# Altium PCB OutputModule.PcbDoc
Units mm, origin at the board's own origin, x right, y up, seen from the top; angles counter-clockwise.
Board outline 37.08 x 57.91 mm, 2 copper layers (Top Layer, Bottom Layer); 47 components, 38 nets, 176 pads, 55 vias.
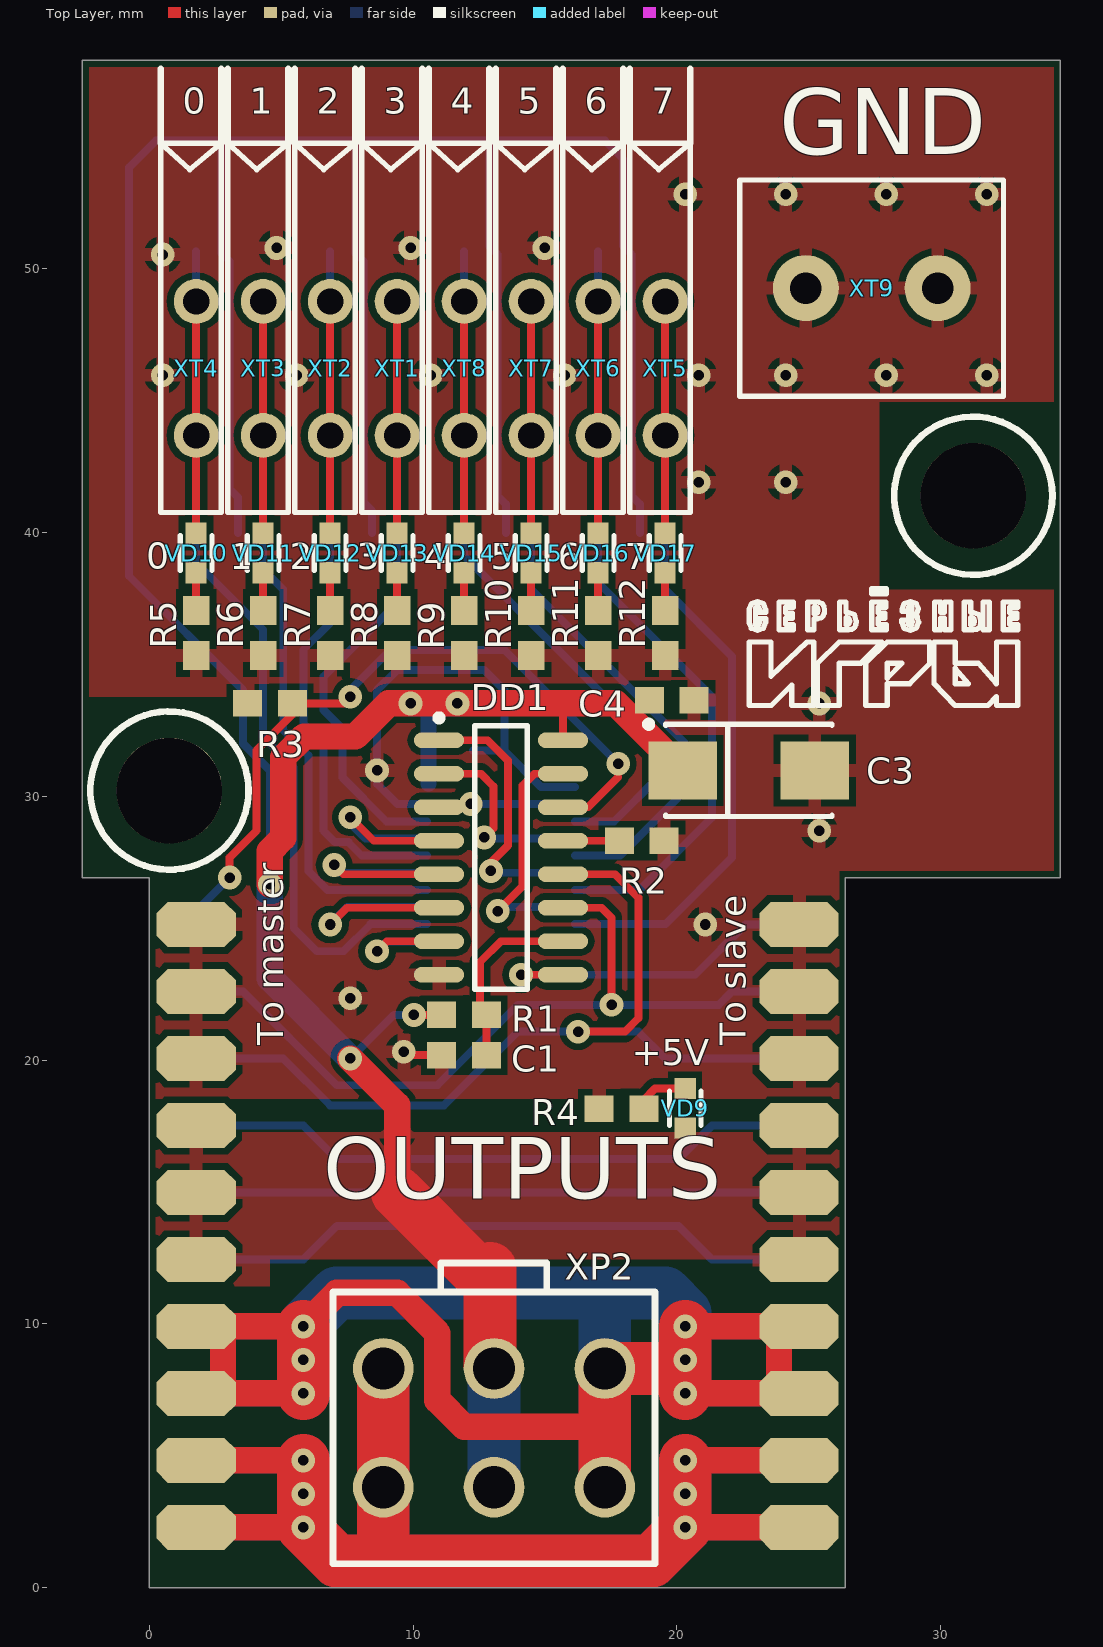
[diagram p0: Top Layer view]
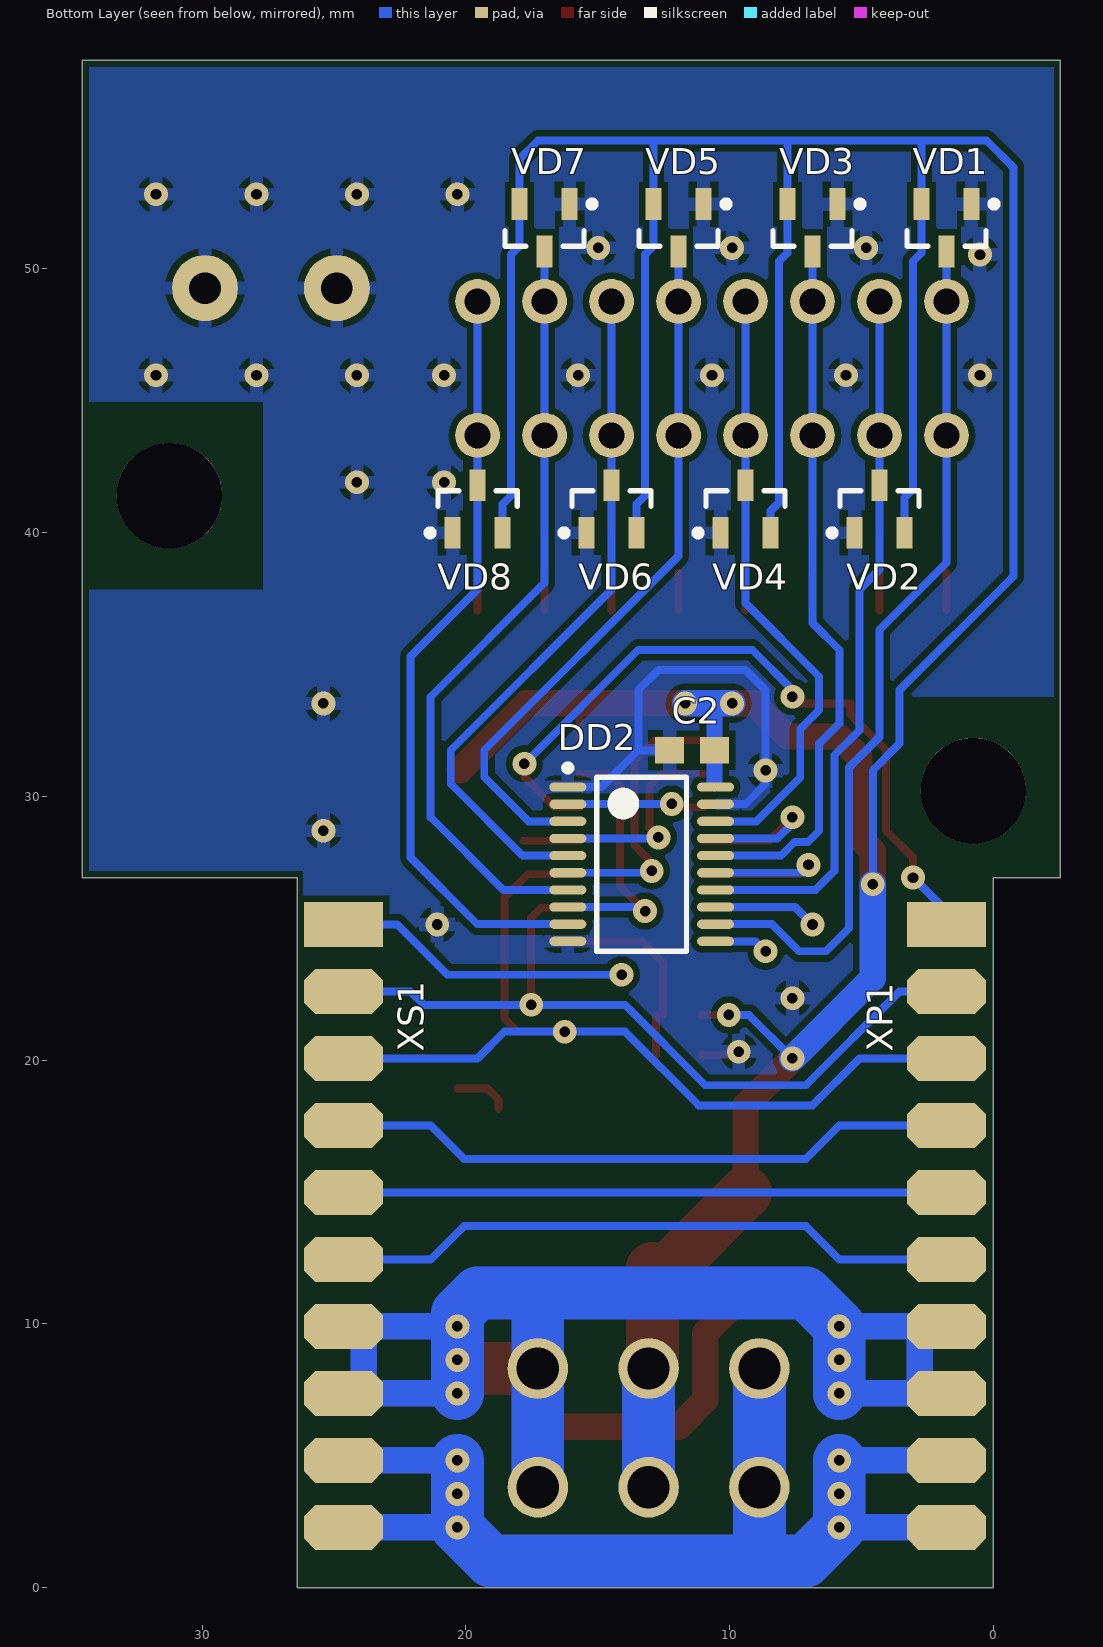
[diagram p1: Bottom Layer view, seen from below]
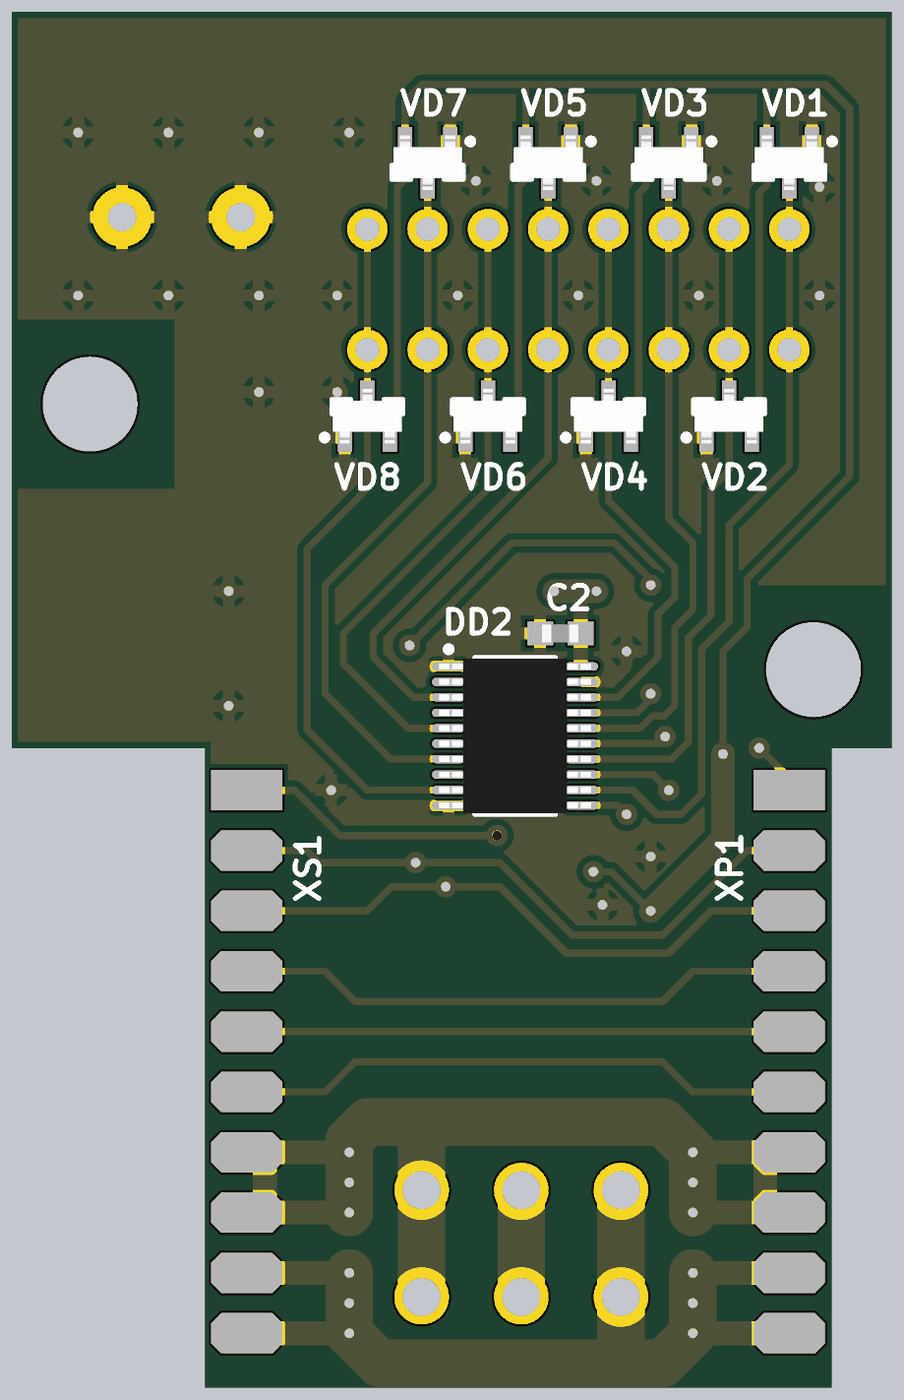
[diagram p2: 3D render of the assembled board from below, using the file's embedded part models]

## Layer stack, top to bottom
Top Layer: signal copper 0.0356
Dielectric: dielectric 0.32, FR-4, Dk 4.8
Bottom Layer: signal copper 0.0356

## Board outline
-2.54,26.924 -2.54,57.912 34.544,57.912 34.544,26.924 26.397,26.924 26.397,0 0,0 0,26.924

## Design rules (kind name [scope] priority, off if disabled: settings)
Clearance [All] p1: gap=0.254
PolygonConnect [All] p1: connectstyle=Relief reliefconductorwidth=0.5 reliefentries=4 polygonreliefangle="90 Angle"
RoutingVias [All] p1: holewidth=0.4 width=0.9 viastyle="Through Hole" minholewidth=0.3 minwidth=0.6 maxholewidth=7 maxwidth=7
SilkscreenOverComponentPads [All] p1: minsilkscreentomaskgap=0.254
SolderMaskExpansion [All] p1: expansion=0.102
Width [All] p1: maxlimit=2.54 minlimit=0.254 preferedwidth=0.254
27 further rules are at their usual default settings.

## Components (designator, comment, footprint, x,y, rotation, side; value= is the part's Value field where it differs from the comment)
C1 "0.1uF" C-1608[0603] 11.938,20.193 r0 top
C2 "0.1uF" C-1608[0603] 11.43,31.75 r0 bottom
C3 "47uF" C-CASE 22.733,30.988 r0 top
C4 "0.1uF" C-1608[0603] 19.812,33.655 r0 top
DD1 "SN74HC595D" SO-G16 13.335,27.686 r0 top
DD2 "74ABT244" TSSOP20 13.335,27.432 r180 bottom
R1 "10K" R-1608[0603] 11.938,21.717 r180 top
R2 "10K" R-1608[0603] 18.669,28.321 r0 top
R3 "10K" R-1608[0603] 4.572,33.528 r180 top
R4 "1K" R-1608[0603] 17.907,18.161 r0 top
R5 "1K" R-1608[0603] 1.778,36.195 r90 top
R6 "1K" R-1608[0603] 4.318,36.195 r90 top
R7 "1K" R-1608[0603] 6.858,36.195 r90 top
R8 "1K" R-1608[0603] 9.398,36.195 r90 top
R9 "1K" R-1608[0603] 11.938,36.195 r90 top
R10 "1K" R-1608[0603] 14.478,36.195 r90 top
R11 "1K" R-1608[0603] 17.018,36.195 r90 top
R12 "1K" R-1608[0603] 19.558,36.195 r90 top
VD1 "BAT54S" SOT-23 1.778,51.562 r270 bottom
VD2 "BAT54S" SOT-23 4.318,40.894 r90 bottom
VD3 "BAT54S" SOT-23 6.858,51.562 r270 bottom
VD4 "BAT54S" SOT-23 9.398,40.894 r90 bottom
VD5 "BAT54S" SOT-23 11.938,51.562 r270 bottom
VD6 "BAT54S" SOT-23 14.478,40.894 r90 bottom
VD7 "BAT54S" SOT-23 17.018,51.562 r270 bottom
VD8 "BAT54S" SOT-23 19.558,40.894 r90 bottom
VD9 "L-C191KGCT" LED-0603 20.32,18.923 r270 top
VD10 "L-C191KGCT" LED-0603 1.778,38.481 r90 top
VD11 "L-C191KGCT" LED-0603 4.318,38.481 r90 top
VD12 "L-C191KGCT" LED-0603 6.858,38.481 r90 top
VD13 "L-C191KGCT" LED-0603 9.398,38.481 r90 top
VD14 "L-C191KGCT" LED-0603 11.938,38.481 r90 top
VD15 "L-C191KGCT" LED-0603 14.478,38.481 r90 top
VD16 "L-C191KGCT" LED-0603 17.018,38.481 r90 top
VD17 "L-C191KGCT" LED-0603 19.558,38.481 r90 top
XP1 "PLD-20" "PLD-20 ROT" 1.778,25.146 r180 bottom
XP2 "MF-6M" MF-6M 17.272,3.81 r180 top
XS1 "PBD-20" "PBD-20 ROT" 24.638,25.146 r180 bottom
XT1 "DG141V-01P" "DG141V-01P (XY123R)" 9.398,43.688 r180 top
XT2 "DG141V-01P" "DG141V-01P (XY123R)" 6.858,43.688 r180 top
XT3 "DG141V-01P" "DG141V-01P (XY123R)" 4.318,43.688 r180 top
XT4 "DG141V-01P" "DG141V-01P (XY123R)" 1.778,43.688 r180 top
XT5 "DG141V-01P" "DG141V-01P (XY123R)" 19.558,43.688 r180 top
XT6 "DG141V-01P" "DG141V-01P (XY123R)" 17.018,43.688 r180 top
XT7 "DG141V-01P" "DG141V-01P (XY123R)" 14.478,43.688 r180 top
XT8 "DG141V-01P" "DG141V-01P (XY123R)" 11.938,43.688 r180 top
XT9 "1-1776244-0 (TYCO)" 1-1776244-0 24.892,49.276 r0 top

## Footprints (in the part's own frame and the unit in brackets; to place one, negate y for a bottom-side part, rotate by r counter-clockwise, add the part's x,y. Pads: shape width x height; smd on the part's side, far side on the other; paste and mask are expansions set on the pad)
1-1776244-0 [mm] "Винтовой клеммник 5.0мм"
  round 2.5 hole 1.2: 1(0,0) 2(5,0)
  silkscreen extent -2.5,-4.1 7.5,4.1, body extent -2.5,-4.1 7.5,4.1, height 10
C-1608[0603] [mm]
  rect 1.1x1 smd: 1(-0.85,0) 2(0.85,0)
  body extent -0.76,-0.38 0.76,0.38, height 0.5
C-CASE [mm]
  rect 2.6x2.2 smd: 1(-2.5,0) 2(2.5,0)
  silkscreen extent -3.92,-1.75 3.15,1.87, body extent -3,-1.6 3,1.6, height 2.51
"DG141V-01P (XY123R)" [mm] "Клеммник нажимной 2.54мм (XY123R-1)"
  round 1.7 hole 1: 1(0,0) 1(0,-5.08)
  silkscreen extent -0.95,-11.08 1.34,2.92, body extent -0.95,-11.08 1.34,2.92, height 12
LED-0603 [mm]
  rect 0.8x0.8 smd: 1(0,0) 2(1.5,0)
  silkscreen extent 0.1,-0.6 1.4,0.6
MF-6M [mm] "Molex Male Connector 6 pin"
  round 2.3 hole 1.6: 1(0,0) 2(4.2,0) 3(8.4,0) 4(0,-4.5) 5(4.2,-4.5) 6(8.4,-4.5)
  silkscreen extent -1.91,-8.5 10.31,2.9, body extent -1.91,-7.4 10.3,2.9, height 12.9
"PBD-20 ROT" [mm] "2.54mm 2row 20pin FEMALE connector"
  rect 3x1.7 smd: 1(0,0)
  oct 3x1.7 smd far side: 2(0,0) 4(0,-2.54) 6(0,-5.08) 8(0,-7.62) 10(0,-10.16) 12(0,-12.7) 14(0,-15.24) 16(0,-17.78) 18(0,-20.32) 20(0,-22.86)
  oct 3x1.7 smd: 3(0,-2.54) 5(0,-5.08) 7(0,-7.62) 9(0,-10.16) 11(0,-12.7) 13(0,-15.24) 15(0,-17.78) 17(0,-20.32) 19(0,-22.86)
  body extent -9.78,-24.18 -1.68,1.32, height 2.7
"PLD-20 ROT" [mm] "2.54mm 2 row 20 pin MALE connector"
  rect 3x1.7 smd: 1(0,0)
  oct 3x1.7 smd far side: 2(0,0) 4(0,-2.54) 6(0,-5.08) 8(0,-7.62) 10(0,-10.16) 12(0,-12.7) 14(0,-15.24) 16(0,-17.78) 18(0,-20.32) 20(0,-22.86)
  oct 3x1.7 smd: 3(0,-2.54) 5(0,-5.08) 7(0,-7.62) 9(0,-10.16) 11(0,-12.7) 13(0,-15.24) 15(0,-17.78) 17(0,-20.32) 19(0,-22.86)
  body extent 1.73,-24.08 9.45,1.32, height 2.7
R-1608[0603] [mm]
  rect 1.1x1 smd: 1(-0.85,0) 2(0.85,0)
  body extent -0.8,-0.4 0.8,0.4, height 0.37
SO-G16 [mm] "SOIC, 16-Leads, Body 9.9x3.9mm, Pitch 1.27mm, IPC High Density"
  oval 1.9x0.6 smd: 1(-2.35,4.445) 2(-2.35,3.175) 3(-2.35,1.905) 4(-2.35,0.635) 5(-2.35,-0.635) 6(-2.35,-1.905) 7(-2.35,-3.175) 8(-2.35,-4.445) 9(2.35,-4.445) 10(2.35,-3.175) 11(2.35,-1.905) 12(2.35,-0.635) 13(2.35,0.635) 14(2.35,1.905) 15(2.35,3.175) 16(2.35,4.445)
  silkscreen extent -2.47,-5 1,5.42, body extent -3,-4.95 3,4.95, height 1.53
SOT-23 [mm] "SOT23, 3-Leads, Body 2.9x1.3mm, Pitch 0.95mm, Lead Span 2.5mm, IPC High Density"
  rect 1.2x0.6 smd: 1(-0.9,0.95) 2(-0.9,-0.95) 3(0.9,0)
  silkscreen extent -1.02,-1.5 0.7,1.92, body extent -1.15,-1.45 1.15,1.45, height 1
TSSOP20 [mm] "TSOP, 20-Leads, Body 6.5x4.4mm, Pitch 0.65mm, IPC High Density"
  oval 1.4x0.35 smd: 1(-2.8,2.925) 2(-2.8,2.275) 3(-2.8,1.625) 4(-2.8,0.975) 5(-2.8,0.325) 6(-2.8,-0.325) 7(-2.8,-0.975) 8(-2.8,-1.625) 9(-2.8,-2.275) 10(-2.8,-2.925) 11(2.8,-2.925) 12(2.8,-2.275) 13(2.8,-1.625) 14(2.8,-0.975) 15(2.8,-0.325) 16(2.8,0.325) 17(2.8,0.975) 18(2.8,1.625) 19(2.8,2.275) 20(2.8,2.925)
  silkscreen extent -2.93,-3.3 1.7,3.77, body extent -3.2,-3.25 3.2,3.25, height 0.97

## Part data
C1 C2 C4: library part C-0603, "C-0603"
C3: library part C-CCASE, "C-CCASE"
DD2: library part SN74LVC244APW, "Octal Buffer/Driver with 3-State Outputs"
R1 R2 R3 R4 R5 R6 R7 R8 R9 R10 R11 R12: library part R-0603, "R-0603"
VD1 VD2 VD3 VD4 VD5 VD6 VD7 VD8: "Schottky barrier (double) diodes"
VD9 VD10 VD11 VD12 VD13 VD14 VD15 VD16 VD17: "0603 Green Led"
XP1: "20 pin, 2 row, MALE connector"
XP2: "Molex Male connector"
XS1: "2.54mm, 20 pin FEMALE connector"
XT1 XT2 XT3 XT4 XT5 XT6 XT7 XT8: "Клеммник нажимной 2.54мм"
XT9: "Винтовой клеммник 5.0мм"

## Free pads (board coordinates)
  round 4 hole 4 unplated: 0(0.762,30.226) 0(31.242,41.402)

## Via types
v1: diameter 0.9, hole 0.4, Top Layer to Bottom Layer, tented both sides, 55 vias

## Nets (pads, with @x,y where several pads share a name; then routed paths per layer and width w, separated by ;. In a path a pad name is that pad's centre, name@x,y a point inside that pad or via, vN(x,y) a via of type N, cw(c..) or ccw(c..) an arc to the next point about the centre after c; other vN are vias at no path point)
+5V: C2.1 C3.1 C4.1 DD1.16 DD2.20 R1.2 VD1.2 VD2.2 VD3.2 VD4.2 VD5.2 VD6.2 VD7.2 VD8.2 VD9.2 XP1.8 XP1.10 XP1.12 XP2.2 XP2.5 XS1.8 XS1.10 XS1.12 | length 167
  Top Layer w0.3: v1(10.033,21.717) R1.2 ; DD1.16 15.685,33.528
  Top Layer w1: v1(4.572,26.67) 4.572,27.932 5.08,28.44 5.08,31.488 5.866,32.274 7.815,32.274 9.069,33.528 v1(9.906,33.528) 15.685,33.528 17.693,33.528 C3.1 ; v1(7.62,20.066) 9.398,18.288 9.398,14.986
  Top Layer w2: 9.398,14.986 12.274,12.11 ; 12.922,12.11 12.922,8.46 XP2.5
  Bottom Layer w0.3: 2.728,54.798 VD1.2 2.728,50.612 3.048,50.292 3.048,41.656 3.368,41.336 VD2.2 ; v1(4.572,26.67) 4.572,30.988 3.556,32.004 3.556,34.036 -0.762,38.354 -0.762,53.848 0.254,54.864 17.272,54.864 17.968,54.168 VD7.2 17.968,50.866 18.288,50.546 18.288,41.402 18.608,41.082 VD8.2 ; v1(7.62,20.066) 9.271,21.717 v1(10.033,21.717) ; 7.808,54.798 VD3.2 7.808,50.612 8.128,50.292 8.128,41.148 8.448,40.828 VD4.2 ; 12.888,54.798 VD5.2 12.888,50.866 13.208,50.546 13.208,41.402 13.528,41.082 VD6.2
  Bottom Layer w0.6: DD2.20@10.58,30.48 C2.1 10.58,33.44
  Bottom Layer w1: v1(4.572,26.67) 4.572,23.114 v1(7.62,20.066) ; v1(9.906,33.528) v1(11.684,33.528)
  Bottom Layer w2: XP2.2 XP2.5
+12V_HC: XP1.13 XP1.14 XP1.15 XP1.16 XP2.1 XP2.4 XS1.13 XS1.14 XS1.15 XS1.16 | length 92.7
  Top Layer w1: v1(5.842,7.366) 2.794,7.366 2.794,9.906 v1(5.842,9.906) 7.112,11.176 9.398,11.176 10.922,9.652 10.922,7.112 11.938,6.096 17.272,6.096 ; v1(20.32,7.366) 23.876,7.366 23.876,9.906 v1(20.32,9.906)
  Top Layer w2: v1(5.842,7.366) v1(5.842,8.636) v1(5.842,9.906) ; XP2.1 17.272,6.096 XP2.4 19.994,8.31 v1(20.32,8.636) ; v1(20.32,7.366) v1(20.32,8.636) ; v1(20.32,9.906) v1(20.32,8.636)
  Bottom Layer w1: v1(5.842,7.366) 2.794,7.366 2.794,9.906 v1(5.842,9.906) ; v1(20.32,7.366) 23.876,7.366 23.876,9.906 v1(20.32,9.906)
  Bottom Layer w2: v1(5.842,7.366) v1(5.842,8.636) v1(5.842,9.906) 7.112,11.176 17.272,11.176 ; XP2.1 XP2.4 17.272,11.176 ; v1(20.32,7.366) v1(20.32,8.636) v1(20.32,9.906) ; 20.32,10.414 19.558,11.176 17.272,11.176
DATA_FROM_MASTER: DD1.14 R3.1 XP1.1 | length 27.6
  Top Layer w0.3: v1(3.048,26.924) 3.048,27.686 4.064,28.702 4.064,31.75 5.422,33.108 R3.1 7.366,33.528 v1(7.62,33.782) ; DD1.14 16.637,29.591 17.78,30.734
  Bottom Layer w0.3: XP1.1 1.778,25.654 v1(3.048,26.924) ; v1(7.62,33.782) 7.62,34.036 9.144,35.56 13.462,35.56 v1(17.78,31.242)
DATA_TO_SLAVE: DD1.9 XS1.1 | length 12.9
  Top Layer w0.3: v1(14.097,23.241) DD1.9
  Bottom Layer w0.3: v1(14.097,23.241) 20.701,23.241 22.606,25.146 XS1.1
DO_0: DD2.12 VD1.3 VD10.2 XT4.1 | length 41.8
  Top Layer w0.3: VD10.2 1.778,43.688 XT4.1@1.778,48.768
  Bottom Layer w0.3: VD1.3 1.778,48.768 1.778,43.688 1.778,38.862 4.318,36.322 4.318,32.258 5.476,31.1 5.476,25.004 6.35,24.13 7.366,24.13 8.393,25.157 DD2.12
DO_1: DD2.14 VD2.3 VD11.2 XT3.1 | length 35.9
  Top Layer w0.3: VD11.2 4.318,43.688 XT3.1@4.318,48.768
  Bottom Layer w0.3: XT3.1@4.318,48.768 4.318,43.688 VD2.3 4.318,38.608 5.08,37.846 5.08,32.512 6.03,31.562 6.03,27.178 6.751,26.457 DD2.14
DO_2: DD2.16 VD3.3 VD12.2 XT2.1 | length 35.8
  Top Layer w0.3: VD12.2 6.858,43.688 XT2.1@6.858,48.768
  Bottom Layer w0.3: VD3.3 6.858,48.768 6.858,43.688 6.858,36.576 5.842,35.56 5.842,32.766 6.604,32.004 6.604,28.702 7.038,28.268 7.546,28.268 8.057,27.757 DD2.16
DO_3: DD2.18 VD4.3 VD13.2 XT1.1 | length 32.2
  Top Layer w0.3: VD13.2 9.398,43.688 XT1.1@9.398,48.768
  Bottom Layer w0.3: XT1.1@9.398,48.768 9.398,43.688 VD4.3 9.398,37.338 6.604,34.544 6.604,33.274 7.323,32.555 7.323,30.72 8.986,29.057 DD2.18
DO_4: DD2.3 VD5.3 VD14.2 XT8.1 | length 35.4
  Top Layer w0.3: VD14.2 11.938,43.688 XT8.1@11.938,48.768
  Bottom Layer w0.3: XT8.1@11.938,43.688 11.938,39.116 19.304,31.75 19.304,30.734 17.627,29.057 DD2.3 ; XT8.1@11.938,43.942 11.938,48.768 VD5.3
DO_5: DD2.5 VD6.3 VD15.2 XT7.1 | length 35.2
  Top Layer w0.3: VD15.2 14.478,43.688 XT7.1@14.478,48.768
  Bottom Layer w0.3: XT7.1@14.478,48.768 14.478,43.688 VD6.3 14.478,37.846 20.574,31.75 20.574,30.48 17.851,27.757 DD2.5
DO_6: DD2.7 VD7.3 VD16.2 XT6.1 | length 38.4
  Top Layer w0.3: VD16.2 17.018,43.688 XT6.1@17.018,48.768
  Bottom Layer w0.3: DD2.7 18.583,26.457 21.336,29.21 21.336,33.782 17.018,38.1 17.018,43.688 17.018,48.768 VD7.3
DO_7: DD2.9 VD8.3 VD17.2 XT5.1 | length 37.9
  Top Layer w0.3: VD17.2 19.558,43.688 XT5.1@19.558,48.768
  Bottom Layer w0.3: DD2.9 19.569,25.157 22.098,27.686 22.098,35.306 19.558,37.846 VD8.3 19.558,43.688 XT5.1@19.558,48.768
GND: C1.1 C2.2 C3.2 C4.2 DD1.8 DD2.1 DD2.10 DD2.19 R2.2 R3.2 R4.1 R5.1 R6.1 R7.1 R8.1 R9.1 R10.1 R11.1 R12.1 VD1.1 VD2.1 VD3.1 VD4.1 VD5.1 VD6.1 VD7.1 VD8.1 XP1.2 XP1.4 XP1.6 XS1.2 XS1.4 XS1.6 XT9.1 XT9.2 | length 19.4
  Top Layer w0.3: v1(9.652,20.32) 9.779,20.193 C1.1
  Bottom Layer w0.3: DD2.19 9.409,29.707 8.636,30.48 v1(8.636,30.988) 8.636,34.036 9.398,34.798 12.7,34.798 13.462,34.036 13.462,31.75 ; C2.2 13.462,31.75 ; DD2.1 14.855,30.357 13.462,31.75
  other v1: 7.62,22.352 21.082,25.146 25.4,28.702 25.4,33.528 20.828,41.91 24.13,41.91 0.508,45.974 5.588,45.974 10.668,45.974 15.748,45.974 20.828,45.974 24.13,45.974 27.94,45.974 31.75,45.974 0.508,50.546 4.826,50.8 9.906,50.8 14.986,50.8 20.32,52.832 24.13,52.832 27.94,52.832 31.75,52.832
GND_HC: XP1.17 XP1.18 XP1.19 XP1.20 XP2.3 XP2.6 XS1.17 XS1.18 XS1.19 XS1.20 | length 82.2
  Top Layer w1: XP1.20@2.794,2.286 v1(5.842,2.286) ; XP1.18@2.794,4.826 v1(5.842,4.826) ; v1(20.32,2.286) XS1.20@23.876,2.286 ; v1(20.32,4.826) XS1.18@23.876,4.826
  Top Layer w2: v1(5.842,4.826) v1(5.842,3.556) v1(5.842,2.286) 7.112,1.016 19.05,1.016 v1(20.32,2.286) v1(20.32,3.556) v1(20.32,4.826) ; 8.872,1.034 XP2.3 XP2.6
  Bottom Layer w1: XP1.19@2.794,2.286 v1(5.842,2.286) ; XP1.17@2.794,4.826 v1(5.842,4.826) ; v1(20.32,2.286) XS1.19@23.876,2.286 ; v1(20.32,4.826) XS1.17@23.876,4.826
  Bottom Layer w2: v1(5.842,4.826) v1(5.842,2.286) 7.112,1.016 19.05,1.016 v1(20.32,2.286) v1(20.32,4.826) ; 8.872,1.034 XP2.6
LO_0: DD1.15 DD2.8 | length 9.9
  Top Layer w0.3: v1(13.208,25.654) 14.154,26.6 14.154,30.41 14.605,30.861 DD1.15
  Bottom Layer w0.3: v1(13.208,25.654) 13.361,25.807 DD2.8
LO_1: DD1.1 DD2.6 | length 10.6
  Top Layer w0.3: DD1.1 12.827,32.131 13.6,31.358 13.6,28.14 12.954,27.494 v1(12.954,27.178)
  Bottom Layer w0.3: v1(12.954,27.178) 13.025,27.107 DD2.6
LO_2: DD1.2 DD2.4 | length 7.7
  Top Layer w0.3: DD1.2 12.573,30.861 13.046,30.388 13.046,28.794 v1(12.7,28.448)
  Bottom Layer w0.3: v1@12.741,28.407 DD2.4
LO_3: DD1.3 DD2.2 | length 5.6
  Top Layer w0.3: DD1.3 12.319,29.591 v1(12.192,29.718)
  Bottom Layer w0.3: v1(12.192,29.718) 12.319,29.591 12.435,29.707 DD2.2
LO_4: DD1.4 DD2.17 | length 7.1
  Top Layer w0.3: v1(7.62,29.21) 8.509,28.321 DD1.4
  Bottom Layer w0.3: v1(7.62,29.21) 7.62,28.977 8.19,28.407 DD2.17
LO_5: DD1.5 DD2.15 | length 7.8
  Top Layer w0.3: v1(7.01,27.406) 7.365,27.051 DD1.5
  Bottom Layer w0.3: v1(7.01,27.406) 7.01,27.28 7.183,27.107 DD2.15
LO_6: DD1.6 DD2.13 | length 8.3
  Top Layer w0.3: v1(6.858,25.146) 7.493,25.781 DD1.6
  Bottom Layer w0.3: v1(6.858,25.146) 7.519,25.807 DD2.13
LO_7: DD1.7 DD2.11 | length 4.6
  Top Layer w0.3: v1(8.636,24.13) 9.017,24.511 DD1.7
  Bottom Layer w0.3: v1(8.636,24.13) 9.013,24.507 DD2.11
NetC1_2: C1.2 DD1.10 R1.1 | length 7
  Top Layer w0.3: R1.1@12.534,21.717 12.534,23.71 13.335,24.511 DD1.10 ; C1.2 R1.1
NetDD1_13: DD1.13 R2.1 | length 2.1
  Top Layer w0.3: DD1.13 R2.1
NetR4_2: R4.2 VD9.1 | length 2.1
  Top Layer w0.3: R4.2 18.757,18.503 19.177,18.923 VD9.1
NetR5_2: R5.2 VD10.1 | length 1.4
  Top Layer w0.3: R5.2 VD10.1
NetR6_2: R6.2 VD11.1 | length 1.4
  Top Layer w0.3: R6.2 VD11.1
NetR7_2: R7.2 VD12.1 | length 1.4
  Top Layer w0.3: R7.2 VD12.1
NetR8_2: R8.2 VD13.1 | length 1.4
  Top Layer w0.3: R8.2 VD13.1
NetR9_2: R9.2 VD14.1 | length 1.4
  Top Layer w0.3: R9.2 VD14.1
NetR10_2: R10.2 VD15.1 | length 1.4
  Top Layer w0.3: R10.2 VD15.1
NetR11_2: R11.2 VD16.1 | length 1.4
  Top Layer w0.3: R11.2 VD16.1
NetR12_2: R12.2 VD17.1 | length 1.4
  Top Layer w0.3: R12.2 VD17.1
NetXP1_7: XP1.7 XS1.7 | length 22.1
  Bottom Layer w0.3: XP1.7@2.794,17.526 5.842,17.526 7.112,16.256 20.066,16.256 21.336,17.526 XS1.7@23.876,17.526
NetXP1_9: XP1.9 XS1.9 | length 21.1
  Bottom Layer w0.3: XP1.9@2.794,14.986 XS1.9@23.876,14.986
NetXP1_11: XP1.11 XS1.11 | length 22.1
  Bottom Layer w0.3: XP1.11@2.794,12.446 5.842,12.446 7.112,13.716 20.066,13.716 21.336,12.446 XS1.11@23.876,12.446
SHCP: DD1.11 XP1.3 XS1.3 | length 31.1
  Top Layer w0.3: DD1.11 17.145,25.781 17.526,25.4 v1(17.526,22.098)
  Bottom Layer w0.3: XP1.3 3.556,22.606 7.112,19.05 10.922,19.05 13.97,22.098 v1(17.526,22.098) 21.59,22.098 22.098,22.606 XS1.3
STCP: DD1.12 XP1.5 XS1.5 | length 35.5
  Top Layer w0.3: DD1.12 17.653,27.051 18.542,26.162 18.542,21.59 18.034,21.082 v1(16.256,21.082)
  Bottom Layer w0.3: XP1.5 5.08,20.066 6.858,18.288 11.176,18.288 13.97,21.082 v1(16.256,21.082) 18.542,21.082 19.558,20.066 XS1.5

## Polygon pours and split planes (outlines as drawn)
+5V on Top Layer "Top Layer-No Net 1" (solid, remove dead copper, pour order 1001): 4.572,17.526 4.572,18.542 0.254,18.542 0.254,11.43 4.572,11.43 4.572,12.446 22.86,12.446 22.86,11.43 26.162,11.43 26.162,18.542 22.86,18.542 22.86,17.526
GND on Top Layer "Top Layer-No Net" (solid, remove dead copper, pour order 1000): -2.286,57.658 -2.286,33.782 4.318,33.782 4.318,26.67 0.254,26.67 0.254,18.542 26.162,18.542 26.162,27.178 34.29,27.178 34.29,37.846 27.686,37.846 27.686,44.958 34.29,44.958 34.29,57.658
GND on Bottom Layer "Top Layer-No Net" (solid, remove dead copper, pour order 1001): -2.286,57.658 -2.286,33.782 4.318,33.782 4.318,26.67 0.254,26.67 0.254,18.542 26.162,18.542 26.162,27.178 34.29,27.178 34.29,37.846 27.686,37.846 27.686,44.958 34.29,44.958 34.29,57.658

## Silkscreen, mask and mechanical layers (free items; w line width, h text height)
Top Overlay:
  drawing of 237 lines, arcs and shapes, not listed
  text "0" at 1.27,55.88 h1
  text "1" at 3.81,55.88 h1
  text "2" at 6.35,55.88 h1
  text "3" at 8.89,55.88 h1
  text "4" at 11.43,55.88 h1
  text "5" at 13.97,55.88 h1
  text "6" at 16.51,55.88 h1
  text "7" at 19.05,55.88 h1
  text "GND" at 23.876,54.356 h2.5
  text "0" at 0.762,39.624 h1 r180
  text "1" at 3.048,38.608 h1
  text "2" at 5.334,38.608 h1
  text "3" at 7.874,38.608 h1
  text "4" at 10.414,38.608 h1
  text "5" at 12.954,38.608 h1
  text "6" at 15.494,38.608 h1
  text "7" at 18.034,38.608 h1
  text "To master" at 5.08,20.574 h1 r90
  text "To slave" at 22.606,20.574 h1 r90
  text "+5V" at 18.288,19.812 h1
  text "OUTPUTS" at 6.604,13.97 h4
Mechanical 1:
  the board outline again, w0.2